# EAGLE board PGTNXEN_midi_inout (EAGLE 8.5.2)
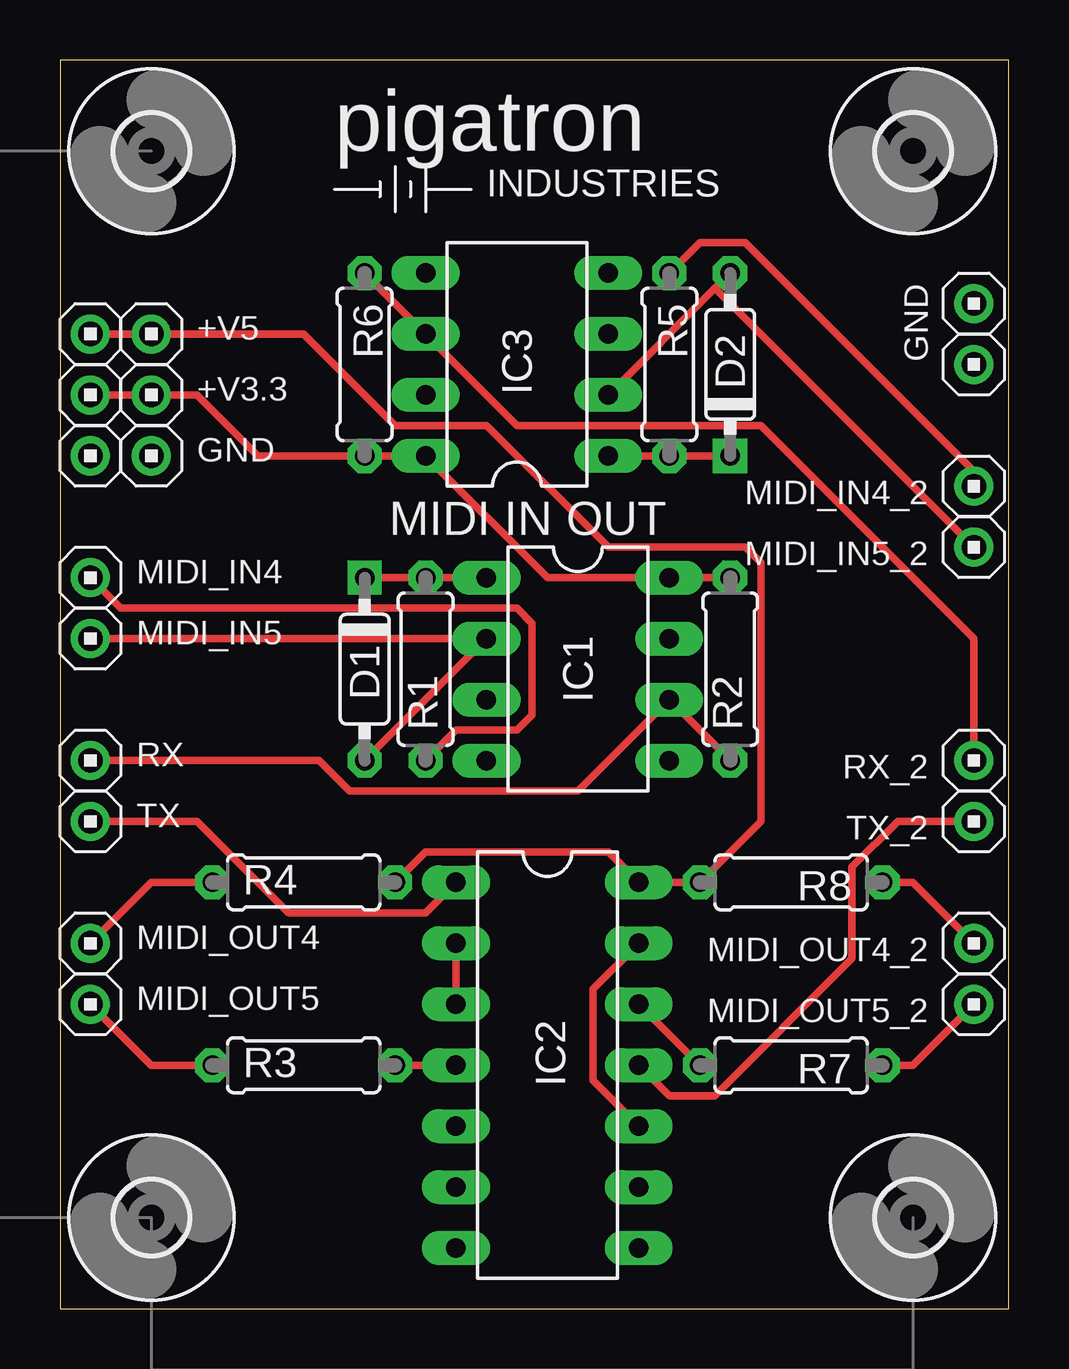
[diagram p0: board, top side]
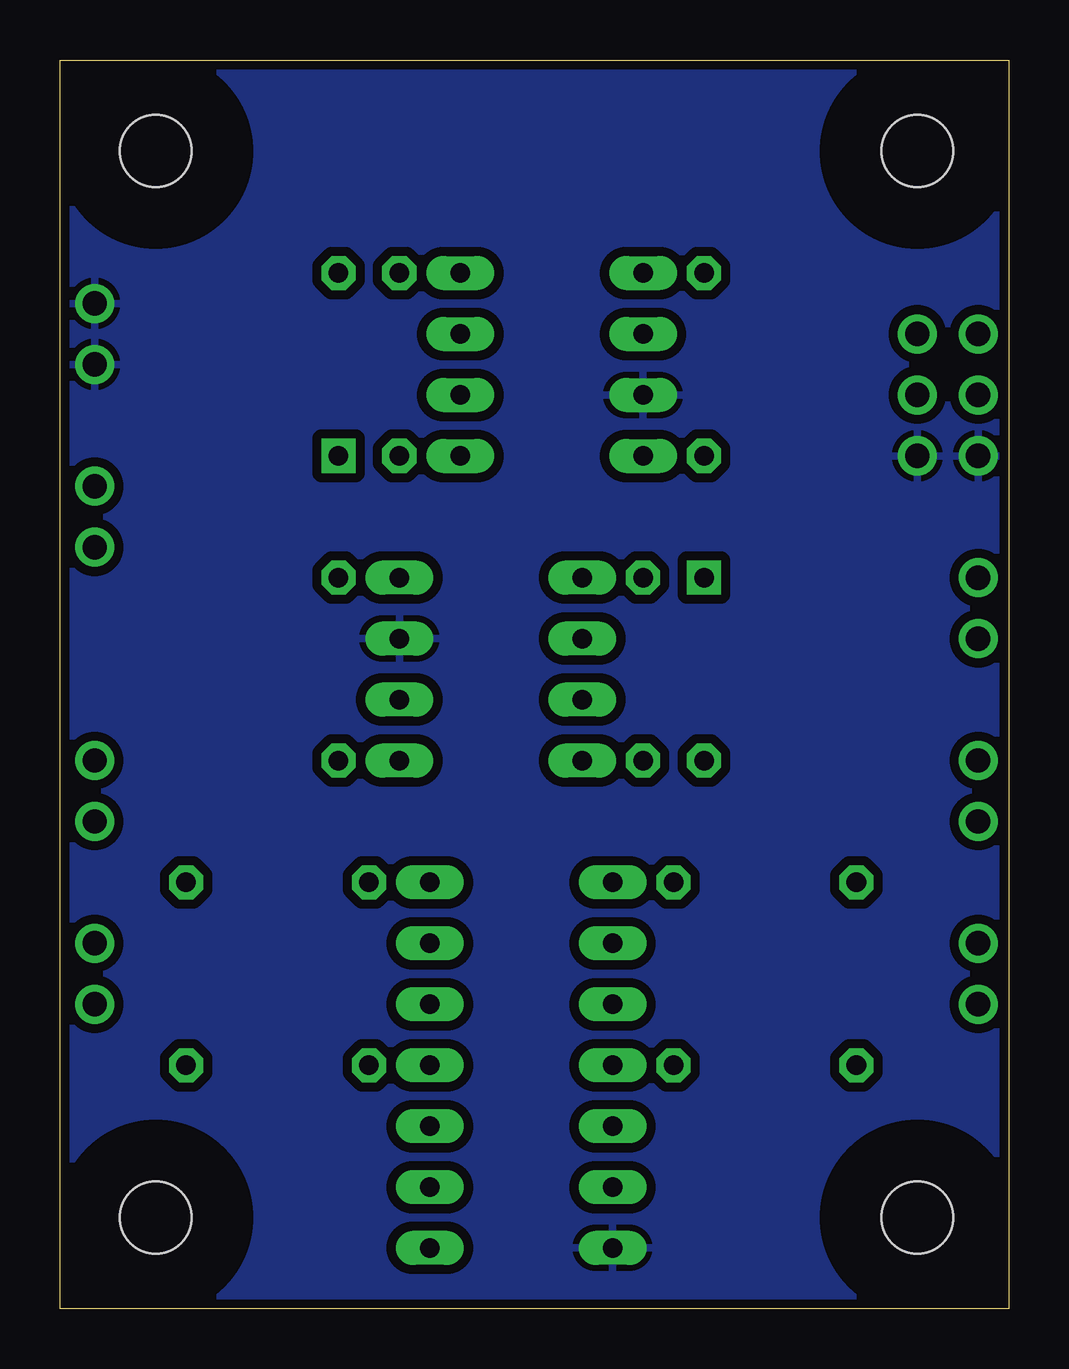
[diagram p1: board, bottom side, seen from below]

Size 39.55 x 52.06 mm. Coordinates in mm from the lower left corner, seen from the top.
Outline: 0,0 39.55,0 39.55,52.06 0,52.06 0,0
Copper layers (1*16): Top 0.0356mm / dielectric 1.5011mm / Bottom 0.0356mm
Design rules "pigatron": minimum track width 12mil, minimum drill 13mil, track to track 15mil, track to pad 10mil, pad to pad 10mil, via to via 10mil, smd to smd 6mil, copper to edge 15mil, drill to drill 10mil, minimum pad ring 12mil, minimum via ring 10mil, stop-mask expansion 4mil, vias tented up to drill 0mil, thermal gap 10mil

## Footprints (pad centres in the part's own frame; a part is rotated, then mirrored left to right if it is on the bottom)
HEADER/MALE/01 = drill 1.016: 1 0,0
DO35-7 = drill 0.813 octagon: A 3.81,0 | drill 0.813 square: C -3.81,0
DIL08 = drill 0.813 long: 1 -3.81,-3.81; 2 -1.27,-3.81; 3 1.27,-3.81; 4 3.81,-3.81; 5 3.81,3.81; 6 1.27,3.81; 7 -1.27,3.81; 8 -3.81,3.81
DIL14 = drill 0.813 long: 1 -7.62,-3.81; 2 -5.08,-3.81; 3 -2.54,-3.81; 4 0,-3.81; 5 2.54,-3.81; 6 5.08,-3.81; 7 7.62,-3.81; 8 7.62,3.81; 9 5.08,3.81; 10 2.54,3.81; 11 0,3.81; 12 -2.54,3.81; 13 -5.08,3.81; 14 -7.62,3.81
RESISTOR/7.5 = drill 0.813 octagon: 1 -3.81,0; 2 3.81,0
STANDOFF/3.0 = hole 3: 0,0

## Placement (x,y rotation side)
+V3.3  HEADER/MALE/01  [HEADER/MALE/01]  3.81,38.1 0 top
+V3.3_2  HEADER/MALE/01  [HEADER/MALE/01]  1.27,38.1 0 top
+V5  HEADER/MALE/01  [HEADER/MALE/01]  1.27,40.64 0 top
+V5_1  HEADER/MALE/01  [HEADER/MALE/01]  3.81,40.64 0 top
D1  [DO35-7]  12.7,26.67 270 top
D2  [DO35-7]  27.94,39.37 90 top
GND  HEADER/MALE/01  [HEADER/MALE/01]  3.81,35.56 0 top
GND1  HEADER/MALE/01  [HEADER/MALE/01]  38.1,41.91 0 top
GND2  HEADER/MALE/01  [HEADER/MALE/01]  1.27,35.56 0 top
GND3  HEADER/MALE/01  [HEADER/MALE/01]  38.1,39.37 0 top
IC1  H11L1  [DIL08]  21.59,26.67 270 top
IC2  40106N  [DIL14]  20.32,10.16 270 top
IC3  H11L1  [DIL08]  19.05,39.37 90 top
MIDI_IN4  HEADER/MALE/01  [HEADER/MALE/01]  1.27,30.48 0 top
MIDI_IN4_2  HEADER/MALE/01  [HEADER/MALE/01]  38.1,34.29 180 top
MIDI_IN5  HEADER/MALE/01  [HEADER/MALE/01]  1.27,27.94 0 top
MIDI_IN5_2  HEADER/MALE/01  [HEADER/MALE/01]  38.1,31.75 180 top
MIDI_OUT4  HEADER/MALE/01  [HEADER/MALE/01]  1.27,15.24 0 top
MIDI_OUT4_2  HEADER/MALE/01  [HEADER/MALE/01]  38.1,15.24 180 top
MIDI_OUT5  HEADER/MALE/01  [HEADER/MALE/01]  1.27,12.7 0 top
MIDI_OUT5_2  HEADER/MALE/01  [HEADER/MALE/01]  38.1,12.7 180 top
R1  220R  [RESISTOR/7.5]  15.24,26.67 90 top
R2  220R  [RESISTOR/7.5]  27.94,26.67 90 top
R3  220R  [RESISTOR/7.5]  10.16,10.16 0 top
R4  220R  [RESISTOR/7.5]  10.16,17.78 0 top
R5  220R  [RESISTOR/7.5]  25.4,39.37 270 top
R6  220R  [RESISTOR/7.5]  12.7,39.37 270 top
R7  220R  [RESISTOR/7.5]  30.48,10.16 180 top
R8  220R  [RESISTOR/7.5]  30.48,17.78 180 top
RX  HEADER/MALE/01  [HEADER/MALE/01]  1.27,22.86 0 top
RX_2  HEADER/MALE/01  [HEADER/MALE/01]  38.1,22.86 180 top
TX  HEADER/MALE/01  [HEADER/MALE/01]  1.27,20.32 0 top
TX_2  HEADER/MALE/01  [HEADER/MALE/01]  38.1,20.32 180 top
U$1  [STANDOFF/3.0]  3.81,48.26 0 top
U$2  [STANDOFF/3.0]  3.81,3.81 0 top
U$3  [STANDOFF/3.0]  35.56,3.81 0 top
U$4  [STANDOFF/3.0]  35.56,48.26 0 top
U$5  [PIGATRON-LOGO]  20.32,48.26 0 top

## Library data of the parts
+V3.3 +V3.3_2 +V5 +V5_1 GND GND1-GND3 MIDI_IN4 MIDI_IN4_2 MIDI_IN5 MIDI_IN5_2 MIDI_OUT4 MIDI_OUT4_2 MIDI_OUT5 MIDI_OUT5_2 RX RX_2 TX TX_2 = connectors; SPICEPREFIX: X
D1 D2 = transistors
IC1 IC3 = ic_package
IC2 = 40xx
R1-R8 = resistors
U$1-U$5 = mechanical

## Nets
GND: GND1.1 GND2.1 GND3.1 GND.1 IC1.7 IC2.7 IC3.7
N$1: D1.C IC1.1 R1.2
N$2: MIDI_IN4.1 R1.1
N$3: D1.A IC1.2 MIDI_IN5.1
N$4: IC1.6 R2.1 RX.1
N$5: IC2.11 TX_2.1
N$6: IC2.1 TX.1
N$7: IC2.2 IC2.3
N$8: IC2.4 R3.2
N$9: MIDI_OUT5.1 R3.1
N$11: MIDI_OUT4.1 R4.1
N$12: MIDI_IN4_2.1 R5.1
N$13: D2.C IC3.1 R5.2
N$14: D2.A IC3.2 MIDI_IN5_2.1
N$15: IC3.6 R6.1 RX_2.1
N$16: +V3.3.1 +V3.3_2.1 IC1.8 IC3.8 R2.2 R6.2
N$17: IC2.10 IC2.13
N$18: IC2.12 R7.2
N$19: MIDI_OUT5_2.1 R7.1
N$20: +V5.1 +V5_1.1 IC2.14 R4.2 R8.2
N$21: MIDI_OUT4_2.1 R8.1

## Tracks (layer width: path | path; a pad name or v marks a point on that pad's centre or on a via)
GND
  pour Bottom: 0,52.07 0,0 39.37,0 39.37,52.07
N$1
  Top 0.305: D1.C R1.2 IC1.1
N$2
  Top 0.305: R1.1 16.51,24.13 19.05,24.13 19.68,24.76 19.68,28.57 19.05,29.21 2.54,29.21 MIDI_IN4.1
N$3
  Top 0.305: D1.A IC1.2 MIDI_IN5.1
N$4
  Top 0.305: R2.1 IC1.6 21.59,21.59 12.06,21.59 10.79,22.86 RX.1
N$5
  Top 0.305: IC2.11 25.4,8.89 27.3,8.89 33.02,14.61 33.02,18.41 34.92,20.32 TX_2.1
N$6
  Top 0.305: IC2.1 15.24,16.51 9.53,16.51 5.71,20.32 TX.1
N$7
  Top 0.305: IC2.2 IC2.3
N$8
  Top 0.305: IC2.4 R3.2
N$9
  Top 0.305: R3.1 3.81,10.16 MIDI_OUT5.1
N$11
  Top 0.305: R4.1 3.81,17.78 MIDI_OUT4.1
N$12
  Top 0.305: R5.1 26.67,44.45 28.57,44.45 38.1,34.93 MIDI_IN4_2.1
N$13
  Top 0.305: IC3.1 R5.2 D2.C
N$14
  Top 0.305: D2.A 27.3,42.55 | 27.3,42.55 IC3.2 | 27.3,42.55 MIDI_IN5_2.1
N$15
  Top 0.305: R6.1 IC3.6 19.05,36.83 29.21,36.83 38.1,27.94 RX_2.1
N$16
  Top 0.305: R2.2 IC1.8 20.32,30.48 IC3.8 R6.2 8.26,35.56 5.71,38.1 +V3.3.1 +V3.3_2.1
N$17
  Top 0.305: IC2.10 22.23,9.52 22.23,13.33 IC2.13
N$18
  Top 0.305: R7.2 IC2.12
N$19
  Top 0.305: R7.1 35.56,10.16 MIDI_OUT5_2.1
N$20
  Top 0.305: +V5.1 +V5_1.1 10.16,40.64 13.97,36.83 17.78,36.83 22.86,31.75 28.57,31.75 29.21,31.11 29.21,20.32 R8.2 IC2.14 22.86,19.05 15.24,19.05 R4.2
N$21
  Top 0.305: R8.1 35.56,17.78 MIDI_OUT4_2.1

## Text on the board
tNames: GND | MIDI IN OUT